# Altium PCB Simple Watch Development Board.PcbDoc (part 1 of 2)
Units mil, origin at the board's own origin, x right, y up, seen from the top; angles counter-clockwise.
Board outline 3937.01 x 2559.06 mil, 4 copper layers (Top Layer, Signal Layer 1, Ground Plane, Bottom Layer), stack 40.634 mil thick; 125 components, 93 nets, 403 pads, 128 vias.
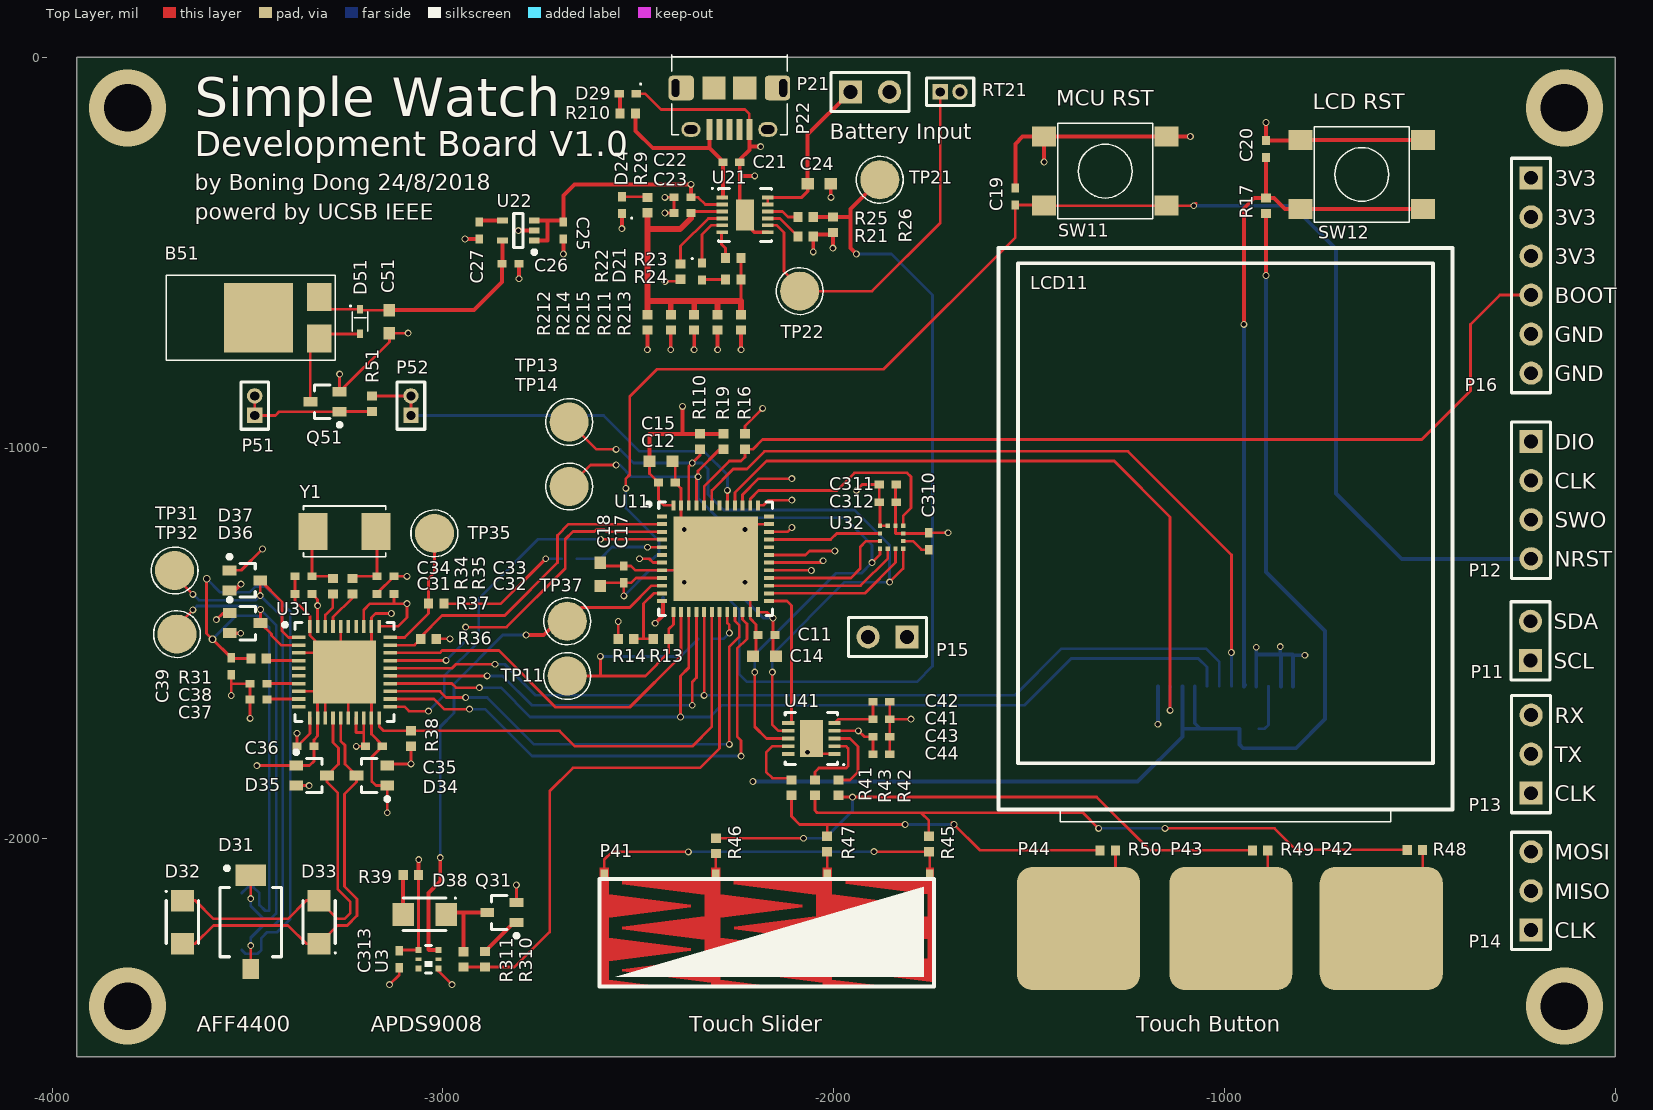
[diagram p0: Top Layer view]
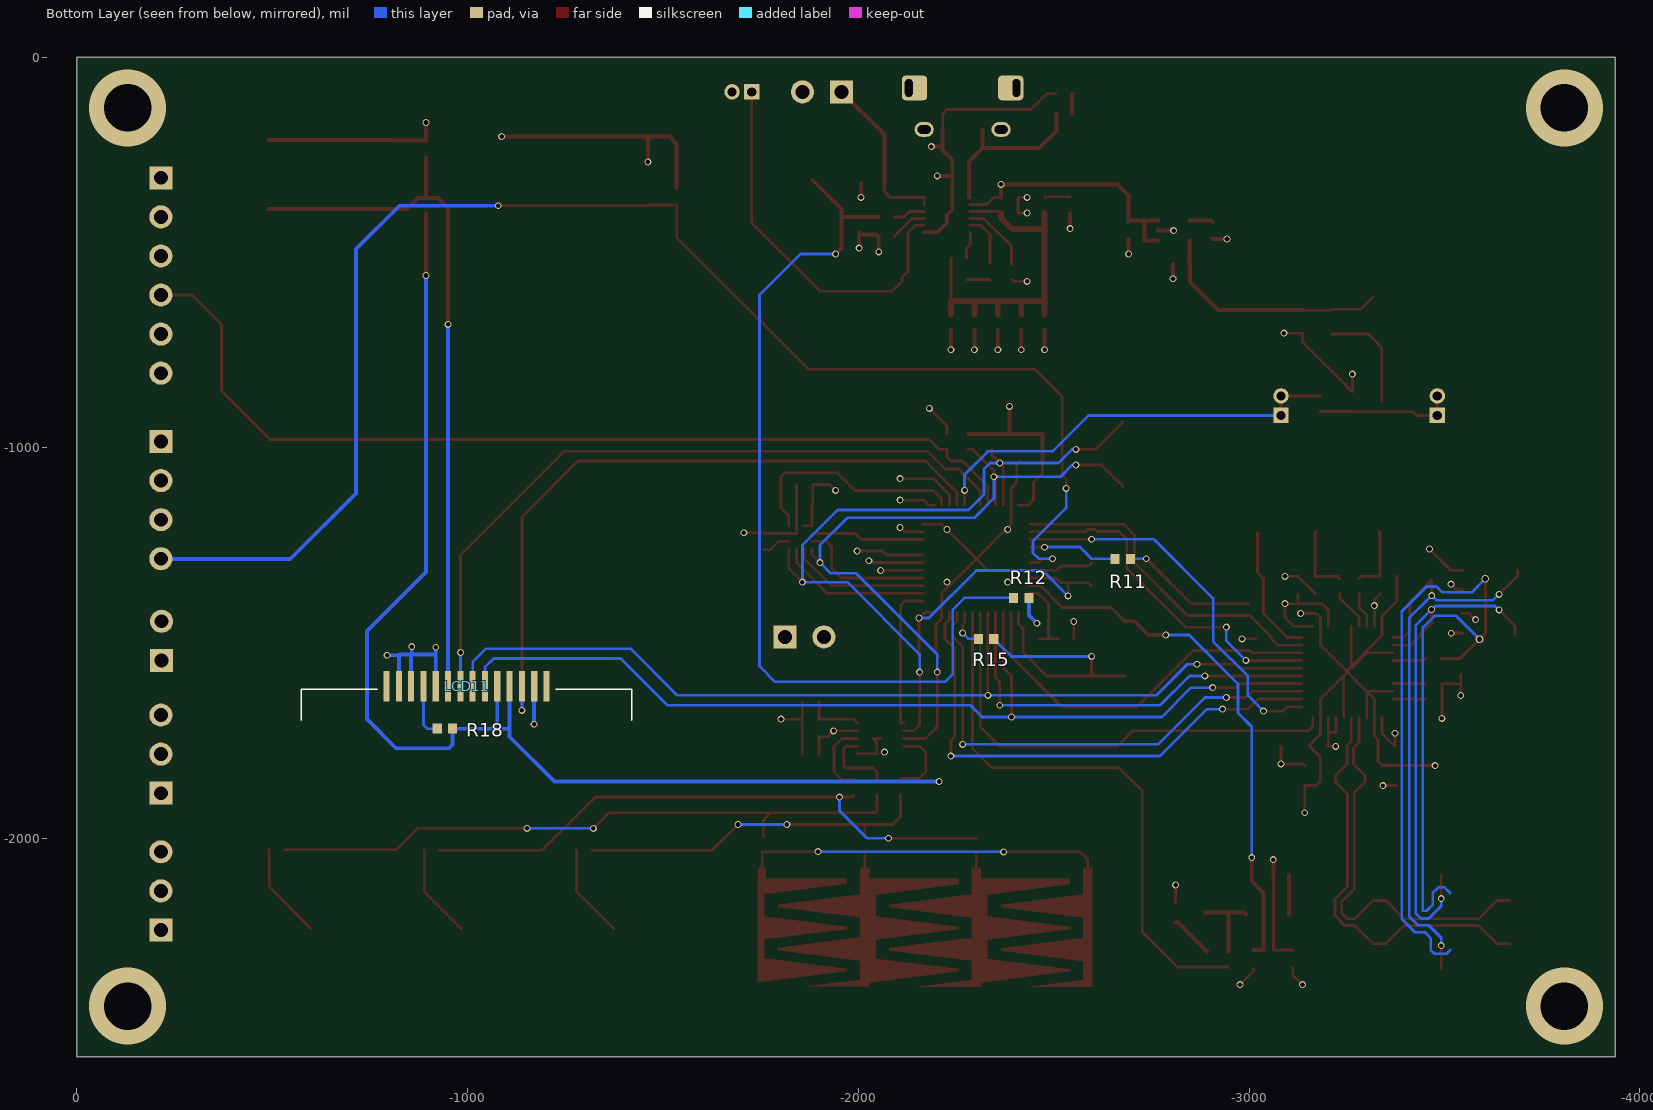
[diagram p1: Bottom Layer view, seen from below]
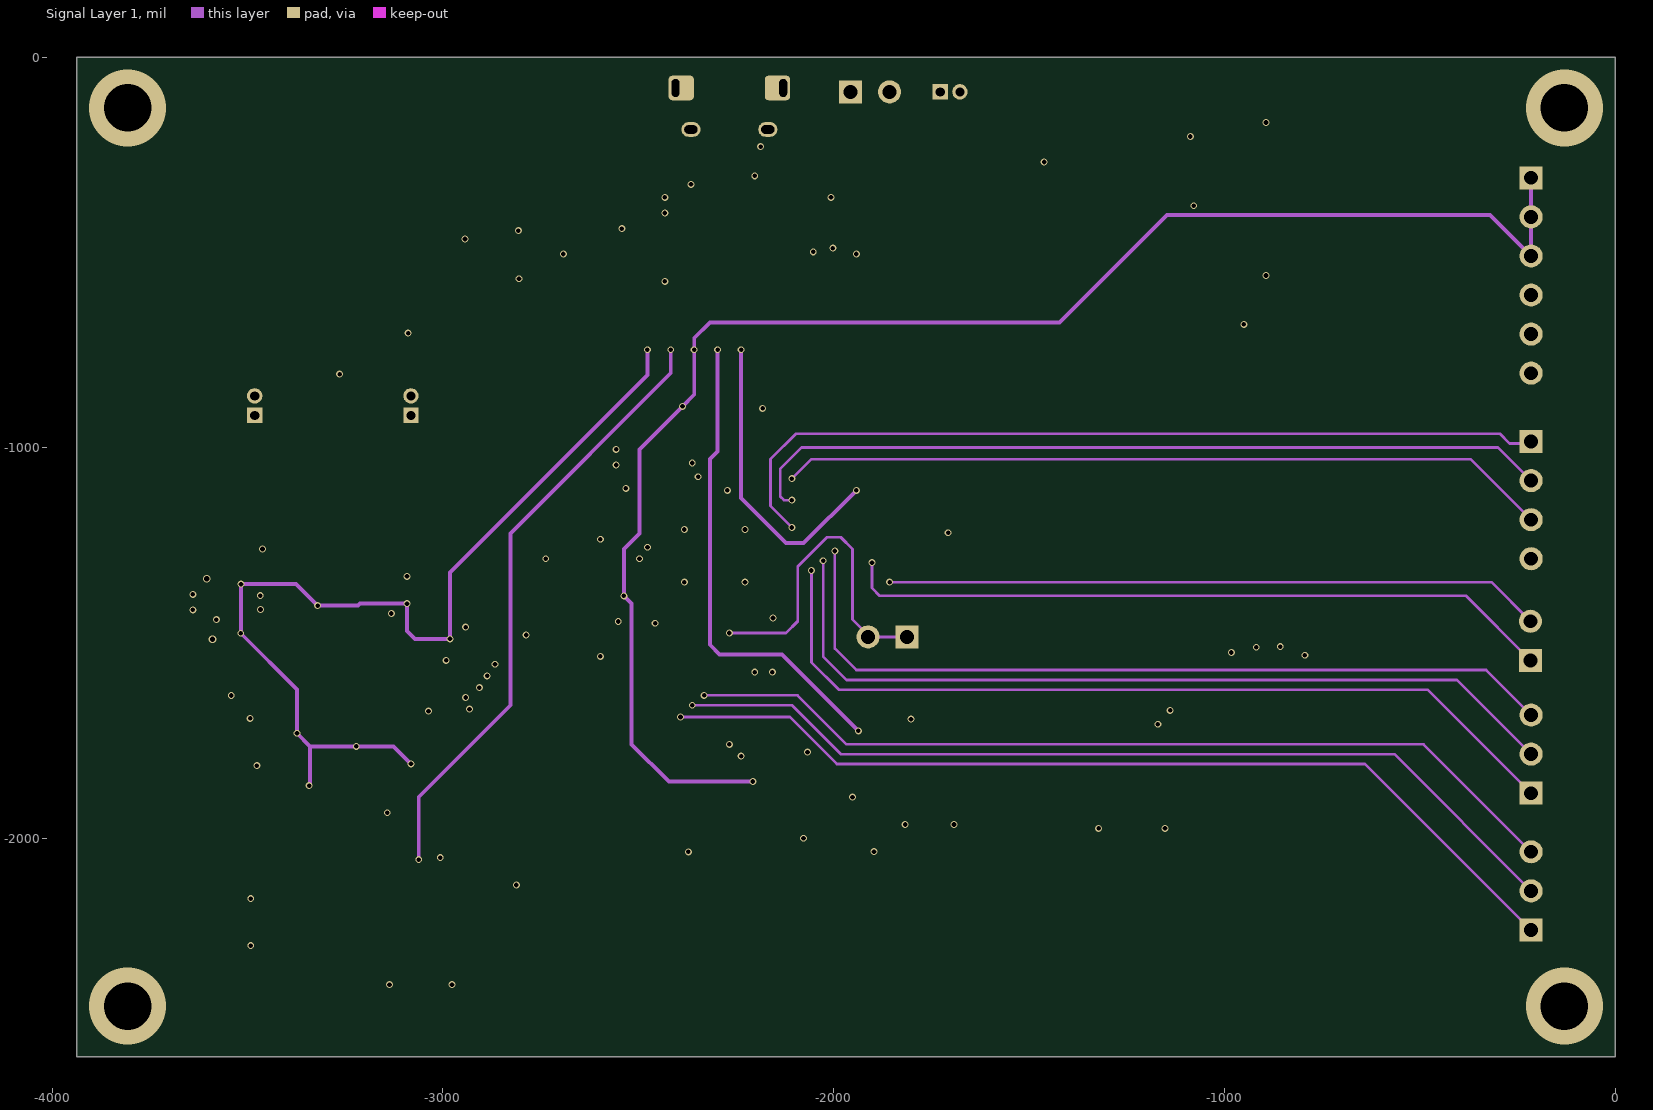
[diagram p2: Signal Layer 1]
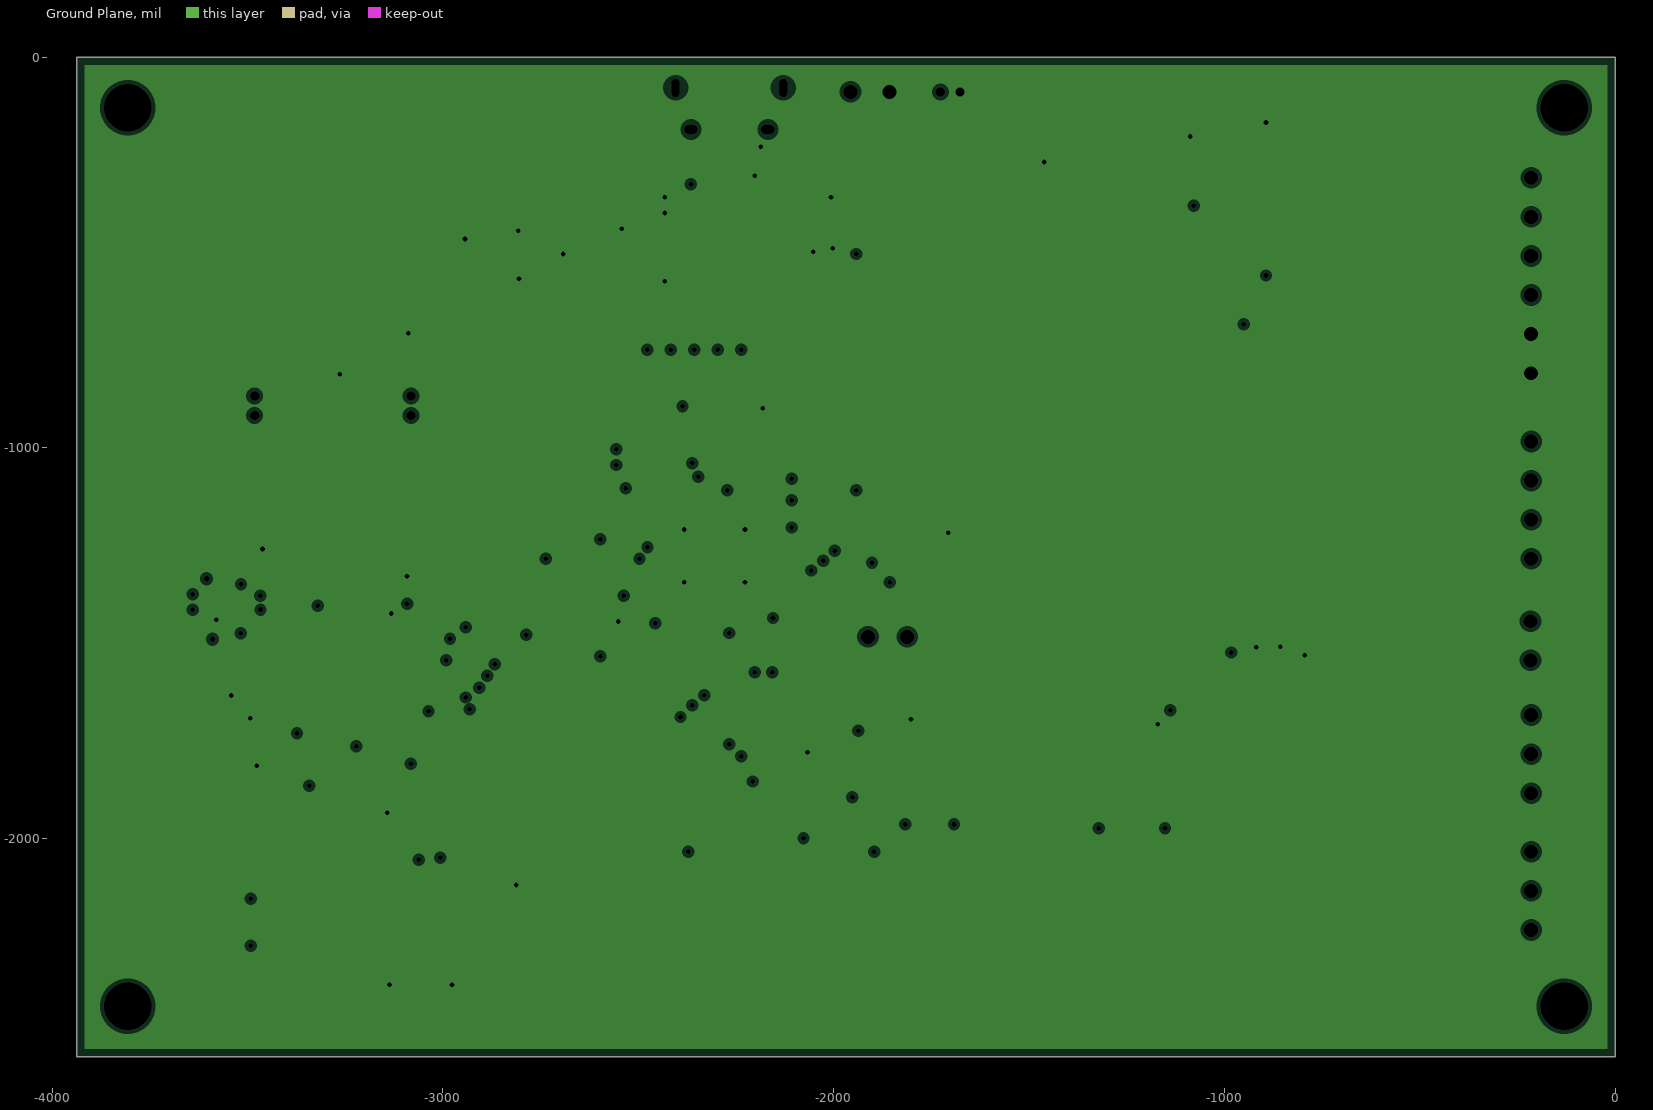
[diagram p3: Ground Plane, clearances drawn from the general rule]
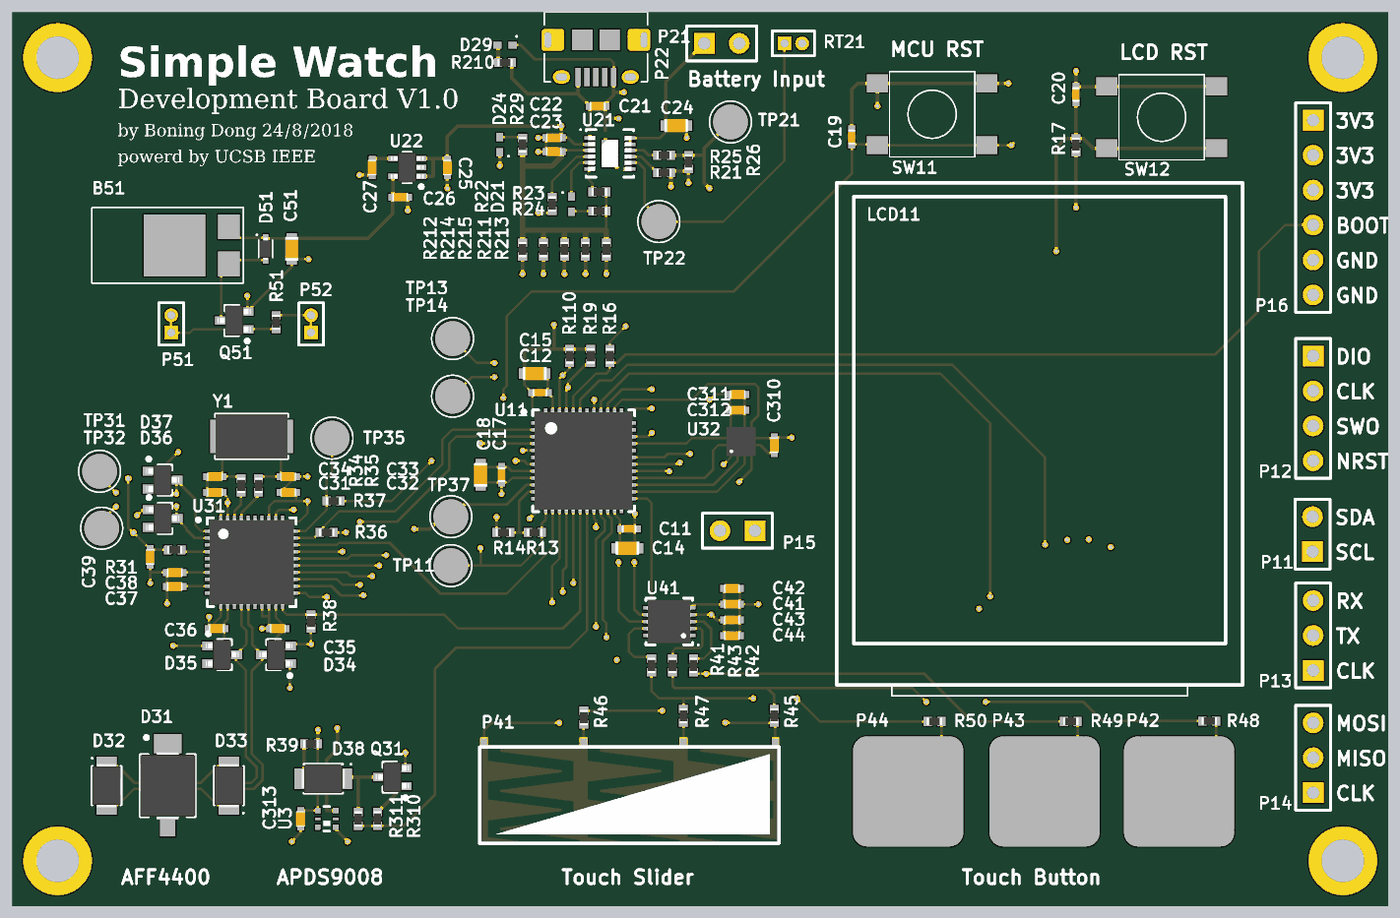
[diagram p5: 3D render of the assembled board from above, using the file's embedded part models]
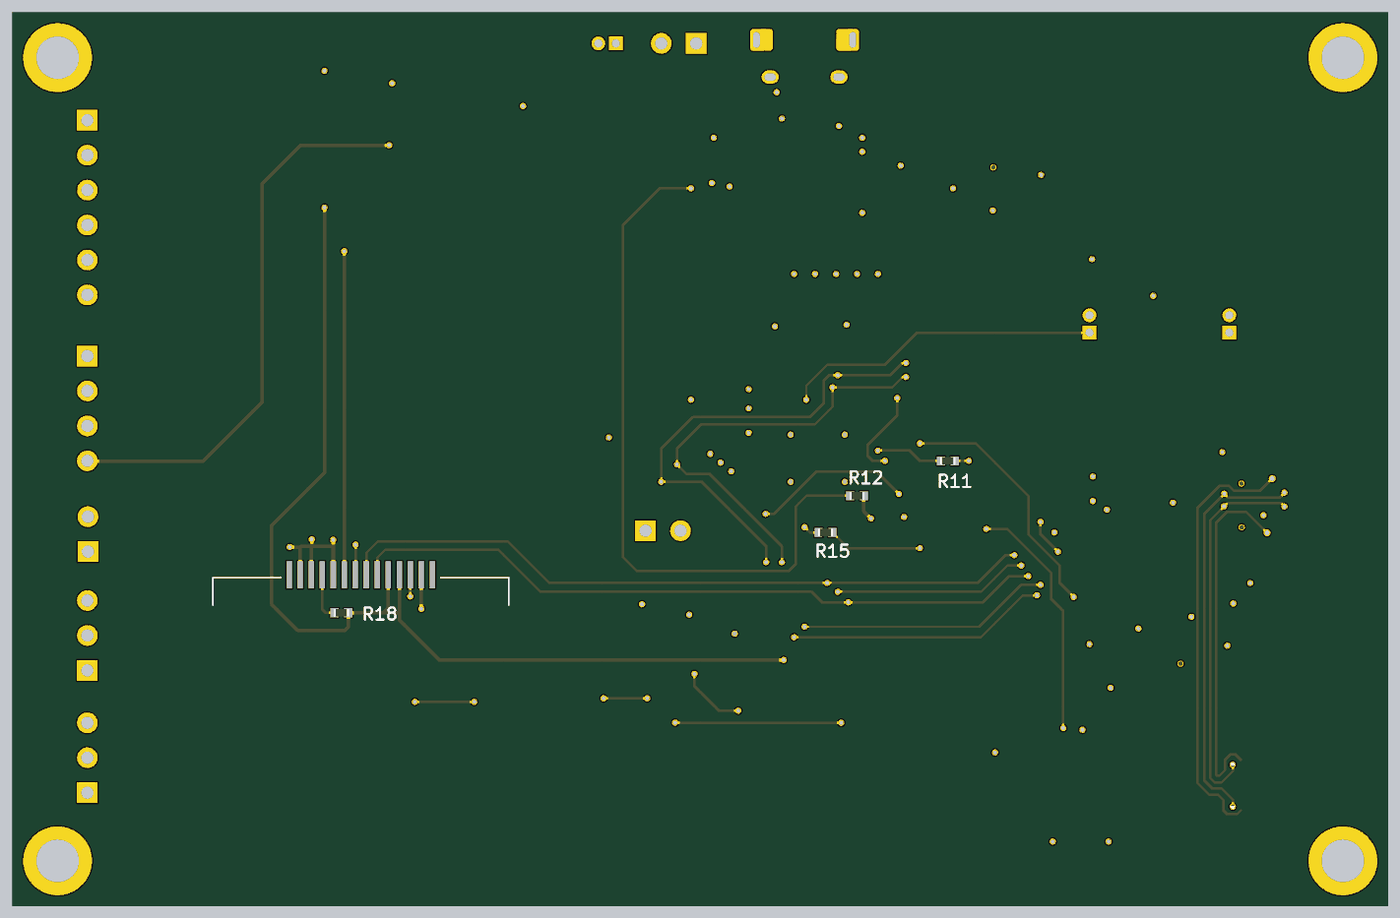
[diagram p6: 3D render of the assembled board from below, using the file's embedded part models]

## Layer stack, top to bottom
Top Solder: solder mask 0.4, Solder Resist, Dk 3.5
Top Layer: signal copper 1.4
Dielectric 1: core 20, FR-4, Dk 4.2
Signal Layer 1: signal copper 1.417
Dielectric 3: prepreg 5, Dk 4.2
Ground Plane: plane copper 1.417, net GND
Dielectric 2: core 10, Dk 4.2
Bottom Layer: signal copper 1.4
Bottom Solder: solder mask 0.4, Solder Resist, Dk 3.5

## Board outline
-3937.01,-2559.06 0,-2559.06 0,0 -3937.01,0

## Design rules (kind name [scope] priority, off if disabled: settings)
Clearance [All] p1: gap=5 ignorepadtopadclearanceinfootprint=FALSE
DiffPairsRouting [All] p1: maxlimit=20 minlimit=10 mostfreqgap=10 toplayer_minwidth=5 toplayer_maxwidth=15 toplayer_prefwidth=15 midlayer1_minwidth=5 midlayer1_maxwidth=15 midlayer1_prefwidth=15 bottomlayer_minwidth=5 bottomlayer_maxwidth=15 bottomlayer_prefwidth=15 maxuncoupledlength=500
PlaneClearance [All] p1: clearance=10
PlaneConnect [All] p1: planeconnectstyle=Relief reliefexpansion=20 reliefentries=4 reliefconductorwidth=10 reliefairgap=10
PolygonConnect [All] p1: connectstyle=Relief reliefconductorwidth=10 reliefentries=4 polygonreliefangle="90 Angle" airgapwidth=10
RoutingVias [All] p1: holewidth=28 width=50 viastyle="Through Hole" minholewidth=28 minwidth=50 maxholewidth=28 maxwidth=50
SolderMaskExpansion [All] p1: expansion=4
Width [All] p1: maxlimit=20 minlimit=5 preferedwidth=10
27 further rules are at their usual default settings.

## Classes and differential pairs
component class "U_SCH_5_Vibration Motor": B51 C51 D51 P51 P52 Q51 R51
net class DIFF: AFE_IN_N AFE_IN_P AFE_TX_N AFE_TX_P
net class POWER_SUPPLY: APDS_SUP LED_DRV_SUP LSM303_SUP MCU_SUP MOTOR_SUP TSC_SUP
net class TOUCH_SENSE_CHANNEL: CH1 CH2 CH3 NetR41_1 NetR42_1 NetR43_1
net class VDD_POWER: GND MCU_SUP
net class UART: USART1_CLK USART1_RX USART1_TX
net class SPI: SPI1_MISO SPI1_MOSI SPI1_SCK
net class MCU_POWER: MCU_SUP
net class MCU_DEBUG: NRST SWCLK SWDIO SWO
net class I2C: I2C1_SCL I2C1_SDA
net class BOOTLOADER: BOOT
component class "U_SCH_4_Touch Sensors": C41 C42 C43 C44 P41 P42 P43 P44 R41 R42 R43 R45 R46 R47 R48 R49 R50 U41
component class "U_SCH_3_Heartrate & Motion Sensors": C31 C32 C33 C34 C35 C36 C37 C38 C39 C310 C311 C312 C313 D31 D32 D33 D34 D35 D36 D37 D38 Q31 R31 R34 R35 R36 R37 R38 R39 R310 R311 TP31 TP32 TP35 TP37 U3 U31 U32 Y1
component class "U_SCH_2_Battery & Power Management": C21 C22 C23 C24 C25 C26 C27 D21 D24 D25 D26 D27 D28 D29 P21 P22 R21 R22 R23 R24 R25 R26 R29 R210 R211 R212 R213 R214 R215 RT21 TP21 TP22 U21 U22
component class U_SCH_1_Controller: C11 C12 C14 C15 C17 C18 C19 C20 LCD11 P11 P12 P13 P14 P15 P16 R11 R12 R13 R14 R15 R16 R17 R18 R19 R110 SW11 SW12 TP11 TP13 TP14 U11
differential pair AFE_TX: +AFE_TX_P -AFE_TX_N
differential pair AFE_IN: +AFE_IN_P -AFE_IN_N

## Components (designator, comment, footprint, x,y, rotation, side; value= is the part's Value field where it differs from the comment)
B51 "Z4FC1B1301781" Z4FC1B1301781 -3317.01,-667.2 r0 top
C11 "0402" CAPC1005X06N -2172.01,-1479.06 r0 top value=100nF
C12 "0402" CAPC1005X06N -2427.01,-1089.06 r180 top locked value=100nF
C14 "0603" CAPC1608X09N -2177.01,-1534.06 r0 top value=4.7uF
C15 "0603" CAPC1608X09N -2442.01,-1034.06 r180 top locked value=4.7uF
C17 "0402" CAPC1005X06N -2537.01,-1324.06 r270 top value=100nF
C18 "0603" CAPC1608X09N -2597.01,-1324.06 r270 top value=1uF
C19 "0402" CAPC1005X06N -1535,-356.89 r270 top value=100nF
C20 "0402" CAPC1005X06N -893.5,-235.47 r90 top value=100nF
C21 "0402" CAPC1005X07N -2262.01,-269.06 r180 top locked value=2.2uF
C22 "0402" CAPC1005X07N -2387.01,-359.06 r0 top locked value=2.2uF
C23 "0402" CAPC1005X07N -2387.01,-399.06 r0 top locked value=2.2uF
C24 "0603" CAPC1608X10N -2037.01,-324.06 r180 top locked value=4.7uF
C25 "0402" CAPC1005X07N -2692.01,-444.06 r90 top value=1uF
C26 "0402" CAPC1005X07N -2827.01,-529.06 r180 top locked value=1uF
C27 "0402" CAPC1005X07N -2907.01,-444.06 r90 top locked value=1uF
C31 "0402" CAPC1005X07N -3357.01,-1374.06 r0 top locked value=0.1uF
C32 "0402" CAPC1005X07N -3147.01,-1374.06 r0 top locked value=0.1uF
C33 "0402" CAPC1005X07N -3147.01,-1329.06 r180 top locked value=18pF
C34 "0402" CAPC1005X07N -3357.01,-1329.06 r180 top locked value=18pF
C35 "0402" CAPC1005X07N -3177.01,-1764.06 r180 top locked value=1uF
C36 "0402" CAPC1005X07N -3352.01,-1764.06 r180 top locked value=0.1uF
C37 "0402" CAPC1005X07N -3472.01,-1644.06 r0 top locked value=2.2uF
C38 "0402" CAPC1005X07N -3472.01,-1604.06 r0 top locked value=2.2uF
C39 "0402" CAPC1005X07N -3542.01,-1559.06 r90 top locked value=0.01uF
C41 "0402" CAPC1005X07N -1877.95,-1694.68 r180 top value=100pF
C42 "0402" CAPC1005X07N -1877.95,-1649.68 r180 top value=1uF
C43 "0402" CAPC1005X07N -1877.95,-1739.68 r180 top value=100pF
C44 "0402" CAPC1005X07N -1877.95,-1784.68 r180 top value=1uF
C51 "0603" CAPC1608X10N -3137.01,-677.2 r90 top value=1uF
C310 "0402" CAPC1005X07N -1756.69,-1239.06 r270 top value=0.22uF
C311 "0402" CAPC1005X07N -1861.69,-1094.06 r180 top value=10uF
C312 "0402" CAPC1005X07N -1861.69,-1139.06 r180 top value=0.1uF
C313 "0402" CAPC1005X07N -3112.01,-2309.06 r90 top value=0.1uF
D21 "LED" LED_1005X05N -2337.01,-549.06 r90 top locked
D24 "LED" LED_1005X05N -2542.01,-379.06 r270 top
D29 "LED" LED_1005X05N -2527.01,-94.06 r0 top locked
D31 "SFH-2430" PHOTODIODE_OSRAM_SFH_2430 -3492.01,-2214.06 r90 top
D32 "AA3021" LED_KINGBRIGHT_AA3021 -3667.01,-2214.06 r90 top
D33 "AA3021" LED_KINGBRIGHT_AA3021 -3317.01,-2214.06 r270 top
D34 "BAV99WT1G" SOT65P200X125X90-3N -3182.01,-1839.06 r180 top locked
D35 "BAV99WT1G" SOT65P200X125X90-3N -3336.38,-1839.06 r0 top locked
D36 "BAV99WT1G" SOT65P200X125X90-3N -3506.38,-1449.06 r0 top locked
D37 "BAV99WT1G" SOT65P200X125X90-3N -3507.01,-1339.06 r0 top locked
D38 "AA3021" LED_KINGBRIGHT_AA3021 -3047.01,-2194.06 r0 top
D51 "1N914BWT" SODFL160X70-2N -3212.01,-677.2 r90 top
LCD11 "ILI9168_LCD_Module" LCD_SMT_128X128 -997.24,-1925.43 r0 top
P11 "Header 2" HDR1X2 -216.69,-1544.06 r90 top
P12 "Header 4" HDR1X4 -215,-984.06 r270 top
P13 "Header 3" HDR1X3 -215,-1884.06 r90 top
P14 "Header 3" HDR1X3 -215,-2234.06 r90 top
P15 "Header 2" HDR1X2 -1812.01,-1484.06 r180 top
P16 "Header 6" HDR1X6 -215,-309.06 r270 top
P21 "BAT" HDR1X2 -1957.01,-89.06 r0 top locked
P22 "Micro USB" "USB_Mirco_Amphenol FCI_10118194" -2267.01,-79.06 r180 top locked
P41 "Touchpad Slider" TPAD_SLIDER_21X7 -2599.27,-2379.06 r0 top
P42 "Single Touchpad" TPAD_8X8 -598.5,-2230.47 r0 top
P43 "Single Touchpad" TPAD_8X8 -983.5,-2230.47 r0 top
P44 "Single Touchpad" TPAD_8X8 -1373.5,-2230.47 r0 top
P51 "MHDR1X2" MHDR1X2 -3482.01,-917.2 r90 top
P52 "MHDR1X2" MHDR1X2 -3082.01,-917.2 r90 top
Q31 "DMG1012T" SOT65P200X125X95-3N -2849.41,-2189.65 r180 top
Q51 "DMG1012T" SOT65P200X125X95-3N -3302.01,-882.2 r180 top
R11 "0402" RESC1005X04N -2677.01,-1284.06 r0 bottom value=0R
R12 "0402" RESC1005X04N -2417.01,-1384.06 r180 bottom value=0R
R13 "0402" RESC1005X04N -2442.01,-1489.06 r0 top locked value=?R
R14 "0402" RESC1005X04N -2531.69,-1489.06 r0 top locked value=?R
R15 "0402" RESC1005X04N -2327.01,-1489.06 r180 bottom locked value=0R
R16 "0402" RESC1005X04N -2227.01,-984.06 r90 top value=10K
R17 "0402" RESC1005X04N -893.5,-380.47 r270 top value=10K
R18 "0402" RESC1005X04N -942.01,-1719.06 r180 bottom value=10R
R19 "0402" RESC1005X04N -2282.01,-984.06 r270 top value=1K
R21 "0402" RESC1005X04N -2072.01,-459.06 r180 top locked value=?
R22 "0402" RESC1005X04N -2392.01,-549.06 r90 top locked value=1k
R23 "0402" RESC1005X04N -2257.01,-514.06 r180 top locked value=1k
R24 "0402" RESC1005X04N -2257.01,-569.06 r180 top locked value=1k
R25 "0402" RESC1005X04N -2072.01,-409.06 r0 top locked value=1k
R26 "0402" RESC1005X04N -2002.01,-429.06 r270 top locked value=1k
R29 "0402" RESC1005X04N -2477.01,-379.06 r90 top value=1k
R31 "0402" RESC1005X04N -3472.01,-1539.06 r0 top locked value=1K
R34 "0402" RESC1005X04N -3282.01,-1354.37 r90 top locked value=0R
R35 "0402" RESC1005X04N -3232.01,-1354.37 r90 top locked value=0R
R36 "0402" RESC1005X04N -3037.01,-1489.06 r0 top value=10K
R37 "0402" RESC1005X04N -3017.32,-1399.06 r180 top value=10R
R38 "0402" RESC1005X04N -3082.01,-1744.06 r270 top locked value=10K
R39 "0402" RESC1005X04N -3082.01,-2094.06 r0 top value=10K
R41 "0402" RESC1005X04N -2107.95,-1869.68 r270 top value=470R
R42 "0402" RESC1005X04N -1987.95,-1869.68 r270 top value=470R
R43 "0402" RESC1005X04N -2047.95,-1869.68 r270 top value=470R
R45 "0402" RESC1005X04N -1756.58,-2014.06 r270 top value=0R
R46 "0402" RESC1005X04N -2301.58,-2019.06 r270 top value=0R
R47 "0402" RESC1005X04N -2016.58,-2014.06 r270 top value=0R
R48 "0402" RESC1005X04N -512.32,-2029.06 r0 top value=0R
R49 "0402" RESC1005X04N -908.5,-2030.16 r0 top value=0R
R50 "0402" RESC1005X04N -1298.5,-2030.16 r0 top value=0R
R51 "0402" RESC1005X04N -3182.01,-887.2 r90 top value=0R
R110 "0402" RESC1005X04N -2342.01,-984.06 r270 top value=1K
R210 "0402" RESC1005X04N -2527.01,-144.06 r180 top locked value=1k
R211 "0402" RESC1005X04N -2297.01,-679.06 r270 top value=0R
R212 "0402" RESC1005X04N -2477.01,-679.06 r270 top value=0R
R213 "0402" RESC1005X04N -2237.01,-679.06 r270 top value=0R
R214 "0402" RESC1005X04N -2417.01,-679.06 r270 top value=0R
R215 "0402" RESC1005X04N -2357.01,-679.06 r270 top value=0R
R310 "0402" RESC1005X04N -2892.01,-2309.06 r90 top value=0R
R311 "0402" RESC1005X04N -2947.01,-2309.37 r90 top value=0R
RT21 "Res Thermal" MHDR1X2 -1727.01,-89.06 r0 top
SW11 "Tactile Switch" C&K_PTS645_SMT -1305,-291.89 r180 top
SW12 "Tactile Switch" C&K_PTS645_SMT -648.5,-300.47 r0 top
TP11 "TP" TP100 -2682.01,-1584.06 r0 top
TP13 "TP" TP100 -2677.01,-934.06 r90 top locked
TP14 "TP" TP100 -2677.01,-1099.06 r90 top locked
TP21 "TP" TP100 -1882.01,-314.06 r0 top locked
TP22 "TP" TP100 -2087.01,-599.06 r90 top locked
TP31 "TP" TP100 -3687.01,-1314.06 r0 top locked
TP32 "TP" TP100 -3680.91,-1476.93 r90 top locked
TP35 "TP" TP100 -3022.01,-1219.06 r90 top locked
TP37 "TP" TP100 -2682.01,-1444.06 r90 top locked
U3 "APDS-9008" APDS-9008 -3037.01,-2309.06 r90 top
U11 "STM32L452CC" QFN50P700X700X60-48N_HS550X550 -2302.01,-1284.06 r0 top locked
U21 "STNS01" DFN45P300X300X80-12N_HS200X120 -2227.01,-404.06 r0 top locked
U22 "LDK120C30R" SOT65P210X110-5L -2807.01,-444.06 r180 top locked
U31 "AFE4400" QFN50P600X600X100-40N_HS410 -3252.01,-1574.06 r0 top locked
U32 "ST_LSM303AGR" LGA12S50P4X4_200X200X100 -1851.69,-1229.06 r90 top
U41 "IQS263" DFN50P300X300-10N_HS240X150 -2057.01,-1744.06 r180 top
Y1 "ABM3_8MHz" ABRACON_ABM3 -3252.01,-1214.06 r0 top locked

## Footprints (in the part's own frame and the unit in brackets; to place one, negate y for a bottom-side part, rotate by r counter-clockwise, add the part's x,y. Pads: shape width x height; smd on the part's side, far side on the other; paste and mask are expansions set on the pad)
ABRACON_ABM3 [mm] "Abracon ABM3 series, 2-Leads, Body 3.10x5.00mm"
  rect 1.9x2.4 smd: 1(-2.05,0) 2(2.05,0)
  silkscreen extent -2.67,-1.65 2.67,1.65, body extent -2.6,-1.6 2.6,1.6, height 1.3
APDS-9008 [mm] "SMT 1.6mm x 1.5mm x 0.55mm Ambient Light Sensor"
  rect 0.4x0.4 smd: 1(0.6,0.65) 3(-0.6,0.65) 4(-0.6,-0.65) 6(0.6,-0.65)
  rect 0.2x0.4 smd: 2(0,0.65) 5(0,-0.65)
  silkscreen extent -0.89,-0.25 0.89,0.25, body extent -0.75,-0.8 0.75,0.8, height 0.55
C&K_PTS645_SMT [mm] "C&K PTS645 6mm x 6mm Tact Switch"
  rect 1.55x1.3 smd: 1(-3.975,2.25) 2(3.975,2.25) 3(-3.975,-2.25) 4(3.975,-2.25)
  silkscreen extent -3.1,-3.1 3.1,3.1
CAPC1005X06N [mm] "0402 Chip Capacitor, 2-Leads, Body 1.00x0.50mm, IPC Medium Density"
  rect 0.6x0.5 smd: 1(-0.55,0) 2(0.55,0)
  body extent -0.55,-0.28 0.55,0.28, height 0.6
CAPC1005X07N [mm] "0402 Chip Capacitor, 2-Leads, Body 1.00x0.50mm, IPC Medium Density"
  rect 0.6x0.5 smd: 1(-0.55,0) 2(0.55,0)
  body extent -0.58,-0.33 0.58,0.33, height 0.71
CAPC1608X09N [mm] "0603 Chip Capacitor, 2-Leads, Body 1.60x0.81mm, IPC Medium Density"
  rect 0.8x0.75 smd: 1(-0.75,0) 2(0.75,0)
  body extent -0.87,-0.48 0.87,0.48, height 0.94
CAPC1608X10N [mm] "0603 Chip Capacitor, 2-Leads, Body 1.60x0.81mm, IPC Medium Density"
  rect 0.8x0.75 smd: 1(-0.75,0) 2(0.75,0)
  body extent -0.87,-0.48 0.87,0.48, height 1.02
DFN45P300X300X80-12N_HS200X120 [mm] "DFN, 12-Leads, Body 3.00x3.00mm, Pitch 0.45mm, Thermal Pad 2.00x1.19mm, IPC Medium Density"
  rect 0.75x0.25 smd: 1(-1.475,1.125) 2(-1.475,0.675) 3(-1.475,0.225) 4(-1.475,-0.225) 5(-1.475,-0.675) 6(-1.475,-1.125) 7(1.475,-1.125) 8(1.475,-0.675) 9(1.475,-0.225) 10(1.475,0.225) 11(1.475,0.675) 12(1.475,1.125)
  rect 1.19x2 smd: 13(0,0)
  silkscreen extent -2.17,-1.73 1.73,1.77, body extent -1.62,-1.57 1.63,1.58, height 0.8
DFN50P300X300-10N_HS240X150 [mm] "DFN, 10-Leads, Body 3.00x3.00mm, Pitch 0.50mm, Thermal Pad 2.40x1.50mm, IPC Medium Density"
  rect 0.8x0.25 smd: 1(-1.5,1) 2(-1.5,0.5) 3(-1.5,0) 4(-1.5,-0.5) 5(-1.5,-1) 6(1.5,-1) 7(1.5,-0.5) 8(1.5,0) 9(1.5,0.5) 10(1.5,1)
  rect 1.49x2.4 smd: 11(0,0)
  silkscreen extent -2.15,-1.7 1.7,1.75, body extent -1.6,-1.55 1.6,1.55, height 0.8
HDR1X2 [mm] "Connector; Header; 2 Position"
  rect 1.5x1.5 hole 0.9: 1(0,0)
  round 1.5 hole 0.9: 2(2.54,0)
  silkscreen extent -1.27,-1.27 3.81,1.27
HDR1X3 [mm] "Connector; Header; 3 Position"
  rect 1.5x1.5 hole 0.9: 1(0,0)
  round 1.5 hole 0.9: 2(2.54,0) 3(5.08,0)
  silkscreen extent -1.27,-1.27 6.35,1.27
HDR1X4 [mm] "Connector; Header; 4 Position"
  rect 1.5x1.5 hole 0.9: 1(0,0)
  round 1.5 hole 0.9: 2(2.54,0) 3(5.08,0) 4(7.62,0)
  silkscreen extent -1.27,-1.27 8.89,1.27
HDR1X6 [mm] "Connector; Header; 6 Position"
  rect 1.5x1.5 hole 0.9: 1(0,0)
  round 1.5 hole 0.9: 2(2.54,0) 3(5.08,0) 4(7.62,0) 5(10.16,0) 6(12.7,0)
  silkscreen extent -1.27,-1.27 13.97,1.27
LCD_SMT_128X128 [mm] "128 x 128 pixels surface mount display"
  rect 0.4x2 smd far side: 1(5.2,8) 2(4.4,8) 3(3.6,8) 4(2.8,8) 5(2,8) 6(1.2,8) 7(0.4,8) 8(-0.4,8) 9(-1.2,8) 10(-2,8) 11(-2.8,8) 12(-3.6,8) 13(-4.4,8) 14(-5.2,8)
  silkscreen extent -14.75,-0.8 14.75,36.5
LED_1005X05N [mm] "General 0402 SMT LED, 2-Leads, Body 1.00x0.50mm, IPC Medium Density"
  rect 0.6x0.5 smd: 1(-0.55,0) 2(0.55,0)
  silkscreen extent 0.79,0.59 0.89,0.68
LED_KINGBRIGHT_AA3021 [mm] "Kingbright AA3021 Series, 2-Leads, Body 2.70x2.00mm, IPC Medium Density"
  rect 1.4x1.5 smd: 1(-1.4,0) 2(1.4,0)
  silkscreen extent -1.4,-1.05 2.05,1.1, body extent -1.62,-1.05 1.62,1.05, height 1.3
LGA12S50P4X4_200X200X100 [mm] "LGA, 12-Leads, Body 2.00x2.00mmx1.00mm, Pitch 0.50mm"
  rect 0.275x0.275 smd: 1(-0.75,0.75) 2(-0.75,0.25) 3(-0.75,-0.25) 4(-0.75,-0.75) 5(-0.25,-0.75) 6(0.25,-0.75) 7(0.75,-0.75) 8(0.75,-0.25) 9(0.75,0.25) 10(0.75,0.75) 11(0.25,0.75) 12(-0.25,0.75)
  body extent -1.05,-1.05 1.05,1.05, height 1
MHDR1X2 [mm] "Connector; Header; 2 Position"
  rect 1x1 hole 0.6: 1(0,0)
  round 1 hole 0.6: 2(1.27,0)
  silkscreen extent -0.9,-0.9 2.17,0.9
PHOTODIODE_OSRAM_SFH_2430 [mm] "OSRAM_SFH_2430 Photonic Diode, 2-Leads, Body 4.40x3.85mm"
  rect 1.3x1.1 smd: 1(-3.05,0)
  rect 1.4x2 smd: 2(3.05,0)
  silkscreen extent -2.25,-2 3.62,2, body extent -2.47,-2 2.47,2, height 1.3
QFN50P600X600X100-40N_HS410 [mm] "QFN, 40-Leads, Body 6.00x6.00mm, Pitch 0.50mm, Thermal Pad 4.10x4.10mm, IPC Medium Density"
  rect 0.85x0.23 smd: 1(-2.975,2.25) 2(-2.975,1.75) 3(-2.975,1.25) 4(-2.975,0.75) 5(-2.975,0.25) 6(-2.975,-0.25) 7(-2.975,-0.75) 8(-2.975,-1.25) 9(-2.975,-1.75) 10(-2.975,-2.25) 21(2.975,-2.25) 22(2.975,-1.75) 23(2.975,-1.25) 24(2.975,-0.75) 25(2.975,-0.25) 26(2.975,0.25) 27(2.975,0.75) 28(2.975,1.25) 29(2.975,1.75) 30(2.975,2.25)
  rect 0.23x0.85 smd: 11(-2.25,-2.975) 12(-1.75,-2.975) 13(-1.25,-2.975) 14(-0.75,-2.975) 15(-0.25,-2.975) 16(0.25,-2.975) 17(0.75,-2.975) 18(1.25,-2.975) 19(1.75,-2.975) 20(2.25,-2.975) 31(2.25,2.975) 32(1.75,2.975) 33(1.25,2.975) 34(0.75,2.975) 35(0.25,2.975) 36(-0.25,2.975) 37(-0.75,2.975) 38(-1.25,2.975) 39(-1.75,2.975) 40(-2.25,2.975)
  rect 4.1x4.1 smd: 41(0,0)
  silkscreen extent -4,-3.22 3.22,3.22, body extent -3.13,-3.13 3.13,3.13, height 1
QFN50P700X700X60-48N_HS550X550 [mm] "QFN, 48-Leads, Body 7.00x7.00mm, Pitch 0.50mm, Thermal Pad 5.50x5.50mm, IPC Medium Density"
  rect 0.65x0.25 smd: 1(-3.475,2.75) 2(-3.475,2.25) 3(-3.475,1.75) 4(-3.475,1.25) 5(-3.475,0.75) 6(-3.475,0.25) 7(-3.475,-0.25) 8(-3.475,-0.75) 9(-3.475,-1.25) 10(-3.475,-1.75) 11(-3.475,-2.25) 12(-3.475,-2.75) 25(3.475,-2.75) 26(3.475,-2.25) 27(3.475,-1.75) 28(3.475,-1.25) 29(3.475,-0.75) 30(3.475,-0.25) 31(3.475,0.25) 32(3.475,0.75) 33(3.475,1.25) 34(3.475,1.75) 35(3.475,2.25) 36(3.475,2.75)
  rect 0.25x0.65 smd: 13(-2.75,-3.475) 14(-2.25,-3.475) 15(-1.75,-3.475) 16(-1.25,-3.475) 17(-0.75,-3.475) 18(-0.25,-3.475) 19(0.25,-3.475) 20(0.75,-3.475) 21(1.25,-3.475) 22(1.75,-3.475) 23(2.25,-3.475) 24(2.75,-3.475) 37(2.75,3.475) 38(2.25,3.475) 39(1.75,3.475) 40(1.25,3.475) 41(0.75,3.475) 42(0.25,3.475) 43(-0.25,3.475) 44(-0.75,3.475) 45(-1.25,3.475) 46(-1.75,3.475) 47(-2.25,3.475) 48(-2.75,3.475)
  rect 5.5x5.5 smd: 49(0,0)
  silkscreen extent -4.47,-3.7 3.7,3.7, body extent -3.6,-3.6 3.6,3.6, height 0.6
RESC1005X04N [mm] "0402 Chip Resistor, 2-Leads, Body 1.00x0.50mm, IPC Medium Density"
  rect 0.6x0.65 smd: 1(-0.5,0) 2(0.5,0)
  body extent -0.55,-0.28 0.55,0.27, height 0.4
SODFL160X70-2N [mm] "SOD-523F, 2-Leads, Body 0.80x1.60mm, IPC Medium Density"
  rect 0.55x0.4 smd: 1(-0.8,0) 2(0.8,0)
  silkscreen extent -0.64,-0.51 1.07,0.68, body extent -0.8,-0.45 0.8,0.45, height 0.7
SOT65P200X125X90-3N [mm] "SOT70 (SOT323), 3-Leads, Body 2.00x2.20mm, Pitch 0.65mm, IPC Medium Density"
  rect 0.9x0.65 smd: 1(-1,0.65) 2(-1,-0.65) 3(1,0)
  silkscreen extent -1.13,-1.1 0.67,1.65, body extent -1.2,-1.1 1.2,1.1, height 1
SOT65P200X125X95-3N [mm] "SOT323, 3-Leads, Body 2.00x1.25x0.95mm, Pitch 0.65mm, IPC Medium Density"
  rect 0.9x0.6 smd: 1(-0.95,0.65) 2(-0.95,-0.65) 3(0.95,0)
  silkscreen extent -1.08,-1.1 0.67,1.62, body extent -1.2,-1.1 1.2,1.1, height 1
SOT65P210X110-5L [mm] "SOT323, 5-Leads, Body 2.00x2.10mm, Pitch 0.65mm, IPC High Density"
  rect 0.7x0.4 smd: 1(-1.025,0.65) 2(-1.025,0) 3(-1.025,-0.65) 4(1.025,-0.65) 5(1.025,0.65)
  silkscreen extent -1.15,-1.1 0.3,1.52, body extent -1.2,-1.1 1.2,1.1, height 1.1
TP100 [mil] "100mil (2.54mm) Test Point"
  round 100 smd: 1(0,0)
  silkscreen extent -60,-60 60,60
TPAD_8X8 [mm] "Touch Pad 8mm x 8mm"
  rrect25% 8x8 smd: 1(0,0)
TPAD_SLIDER_21X7 [mm] "Touch Pad Slider 21mm x 7mm"
  rect 0.5x0.5 smd: 1(0.3,7.366) 1(21.463,7.366) 2(7.55,7.366) 3(14.8,7.366)
  Top Layer region: 21.209,7.009 21.75,7.009 21.75,7.747 21.209,7.747
  Top Layer region: 14.5,7.004 15.101,7.004 15.101,7.747 14.5,7.747
  Top Layer region: 0,6.994 0.601,6.994 0.601,7.747 0,7.747
  Top Layer region: 7.25,6.999 7.851,6.999 7.851,7.747 7.25,7.747
  Top Layer region: 15.99,7.009 15.99,6.671 21.324,5.99 21.324,4.57 15.991,3.891 15.991,3.744 21.324,3.065 21.324,1.83 15.99,1.151 15.99,1.001 21.75,0.268 21.75,7.009
  Top Layer region: 14.5,7.004 14.5,0.01 18.639,0.01 15.101,0.46 15.101,1.67 20.434,2.349 20.434,2.515 15.101,3.194 15.101,4.494 20.435,5.173 20.435,5.325 15.101,6.006 15.101,7.004
  Top Layer region: 8.74,7.004 8.74,6.666 14.074,5.985 14.074,4.565 8.741,3.887 8.741,3.739 14.074,3.06 14.074,1.825 8.74,1.146 8.74,0.996 14.5,0.263 14.5,7.004
  Top Layer region: 7.25,6.999 7.25,0.005 11.389,0.005 7.851,0.455 7.851,1.665 13.184,2.344 13.184,2.51 7.851,3.189 7.851,4.489 13.185,5.168 13.185,5.32 7.851,6.001 7.851,6.999
  Top Layer region: 1.49,6.999 1.49,6.661 6.824,5.98 6.824,4.56 1.491,3.882 1.491,3.734 6.824,3.055 6.824,1.82 1.49,1.141 1.49,0.991 7.25,0.258 7.25,6.999
  Top Layer region: 0,6.994 0,0 4.139,0 0.601,0.45 0.601,1.66 5.934,2.339 5.934,2.505 0.602,3.184 0.601,4.484 5.935,5.163 5.935,5.315 0.601,5.996 0.601,6.994
  silkscreen extent 0,0 21.75,7
"USB_Mirco_Amphenol FCI_10118194" [mm] "Amphenol FCI 10118194 Micro USB Connector"
  rect 0.4x1.35 smd: 1(1.3,2.7) 2(0.65,2.7) 3(0,2.7) 4(-0.65,2.7) 5(-1.3,2.7)
  rrect30% 1.65x1.6 hole 1.15 slot 0.5 at 0 deg copper offset 0.375,0: ""(-3.5,0)
  oval 1.25x0.95 hole 0.55 slot 0.85 at 0 deg: ""(-2.5,2.7) ""(2.5,2.7)
  rect 1.5x1.5 smd: ""(-1,0) ""(1,0)
  rrect30% 1.65x1.6 hole 1.15 slot 0.5 at 0 deg copper offset -0.375,0: ""(3.5,0)
  silkscreen extent -3.75,-2.15 3.75,3.05
Z4FC1B1301781 [mm] "Vibration Motor 10.9 x 4.5 x 4.85mm"
  rect 1.6x1.8 smd: 1(0,1.35) 2(0,-1.35)
  rect 4.5x4.5 smd: ""(-3.95,0)
  silkscreen extent -9.95,-2.75 1.05,2.75

## Part data
B51: "VIBRATION MOTOR CYL 2.7V SMD", Manufacturer="Jinlong Machinery & Electronics", Max Operating Temperature=70°C, Min Operating Temperature=-20°C, Manufacturer Part Number=Z4FC1B1301781, Pricing 1="1=3.49, 5=3.302, 10=3.21, 25=3.1184, 50=2.843, 100=2.568, 250=2.4762, 500=2.4396 (USD)", RPM=10000RPM, Stock 1=7323, Supplier 1=Digi-Key, Termination=SMD/SMT
C11 C12 C14 C15 C17 C18 C19 C20 C21 C22 C23 C24 C25 C26 C27 C31 C32 C33 C34 C35 C36 C37 C38 C39 C41 C42 C43 C44 C51 C310 C311 C312 C313: library part Cap, "Capacitor", LatestRevisionDate=17-Jul-2002, LatestRevisionNote="Re-released for DXP Platform.", PackageDescription="Radial Cap, Thru-Hole; 2 Leads; 0.3 in Pin Spacing", PackageReference=RAD-0.3, Published=8-Jun-2000, Publisher="Altium Limited"
D21 D24 D29: "General LED"
D31: library part "Photo Sen", "Photosensitive Diode", LatestRevisionDate=17-Jul-2002, LatestRevisionNote="Re-released for DXP Platform.", PackageReference=PIN2, Published=24-Mar-1999, Publisher="Altium Limited"
D32 D33 D38: library part LED_GREEN, "General Green LED"
D34 D35 D36 D37: library part BAV99WT1, "DIODE ARRAY GP 100V 215MA SC70-3"
D51: "DIODE GEN PURP 75V 200MA SOD523F", Average Rectified Current=200mA, Forward Current=300mA, Forward Voltage=1V, Manufacturer="ON Semiconductor / Fairchild", Max Operating Temperature=150°C, Max Repetitive Reverse Voltage (Vrrm)=75V, Max Reverse Leakage Current=5uA, Min Operating Temperature=-55°C, Package Quantity=1, Power Dissipation=200mW, ComponentLink1Description=https://datasheet.ciiva.com/910/1n914bwt-910384.pdf, ComponentLink1URL=https://datasheet.ciiva.com/910/1n914bwt-910384.pdf, ComponentLink2Description=https://datasheet.ciiva.com/910/1n914bwt-910385.pdf, ComponentLink2URL=https://datasheet.ciiva.com/910/1n914bwt-910385.pdf, ComponentLink3Description=https://datasheet.ciiva.com/910/1n914bwt-910383.pdf, ComponentLink3URL=https://datasheet.ciiva.com/910/1n914bwt-910383.pdf, ComponentLink4Description=https://datasheet.ciiva.com/25953/1n4448wt-25953279.pdf, ComponentLink4URL=https://datasheet.ciiva.com/25953/1n4448wt-25953279.pdf, Contact Plating=Tin,Matte, Element Configuration=Single, Lead Free="Lead Free", Manufacturer Part Number=1N914BWT, Max Reverse Voltage (DC)=75V, Mount="Surface Mount", Number of Pins=2, Packaging="Tape and Reel", Peak Reverse Current=5uA, Pricing 1="1=0.17, 10=0.159, 100=0.0866, 500=0.0533, 1000=0.0364 (USD)", Radiation Hardening=No, REACH SVHC="No SVHC", Recovery Time=4ns, Reverse Recovery Time=4ns, Stock 1=39736, Supplier 1=Digi-Key, Weight=0.01g
P11 P15 P51 P52: "Header, 2-Pin", LatestRevisionDate=17-Jul-2002, LatestRevisionNote="Re-released for DXP Platform.", Publisher="Altium Limited"
P12: "Header, 4-Pin", LatestRevisionDate=17-Jul-2002, LatestRevisionNote="Re-released for DXP Platform.", Publisher="Altium Limited"
P13 P14: "Header, 3-Pin", LatestRevisionDate=17-Jul-2002, LatestRevisionNote="Re-released for DXP Platform.", Publisher="Altium Limited"
P16: "Header, 6-Pin", LatestRevisionDate=17-Jul-2002, LatestRevisionNote="Re-released for DXP Platform.", Publisher="Altium Limited"
P21: library part MHDR1X2, "Li-Poly Battery", LatestRevisionDate=17-Jul-2002, LatestRevisionNote="Re-released for DXP Platform.", Publisher="Altium Limited"
P22: library part CONN_MICRO_USB, "General  Micro USB", Manufacture P/N=10118194-0001LF
P41: library part PAD_SLIDER_3CH, "General Slider Touchpad"
P42 P43 P44: library part PAD_SINGLE, "General Single Touchpad"
Q31 Q51: library part DMG1012T-7, "MOSFET N-CH 20V 630MA SOT-523", Case/Package=SOT-523, Continuous Drain Current (ID)=630mA, Drain to Source Breakdown Voltage=20V, Drain to Source Resistance=300mR, Gate to Source Voltage (Vgs)=6V, Input Capacitance=60.67pF, Manufacturer=Diodes, Max Operating Temperature=150°C, Max Power Dissipation=280mW, Min Operating Temperature=-55°C, On-State Resistance=400MR, Package Quantity=3000, Threshold Voltage=1V, ComponentLink1Description=https://datasheet.ciiva.com/934/ds31783-934512.pdf, ComponentLink1URL=https://datasheet.ciiva.com/934/ds31783-934512.pdf, ComponentLink2Description=https://datasheet.ciiva.com/4442/ds31783-44973-4442944.pdf, ComponentLink2URL=https://datasheet.ciiva.com/4442/ds31783-44973-4442944.pdf, ComponentLink3Description=https://datasheet.ciiva.com/11174/ds31783-11174965.pdf, ComponentLink3URL=https://datasheet.ciiva.com/11174/ds31783-11174965.pdf, ComponentLink4Description=https://datasheet.ciiva.com/17324/ds31783-17324010.pdf, ComponentLink4URL=https://datasheet.ciiva.com/17324/ds31783-17324010.pdf, ComponentLink5Description=https://datasheet.ciiva.com/6383/ds31783-6383803.pdf, ComponentLink5URL=https://datasheet.ciiva.com/6383/ds31783-6383803.pdf, ComponentLink6Description=https://datasheet.ciiva.com/934/ds31783-934511.pdf, ComponentLink6URL=https://datasheet.ciiva.com/934/ds31783-934511.pdf, Contact Plating=Tin,Matte, Drain to Source Voltage (Vdss)=20V, Element Configuration=Single, Fall Time=12.3ns, FET Type="1 N-Channel", Height=0.8mm, Lead Free="Lead Free", Length=1.7mm, Manufacturer Part Number=DMG1012T-7, Mount="Surface Mount", Number of Channels=1, Number of Elements=1, Number of Pins=3, Packaging="Tape and Reel", Power Dissipation=280mW, Pricing 1="1=0.36, 10=0.326, 100=0.1824, 500=0.0977, 1000=0.0665 (USD)", Radiation Hardening=No, Rds On Max=400mR, REACH SVHC="No SVHC", Rise Time=7.4ns, Stock 1=0, Supplier 1=Digi-Key, Turn-Off Delay Time=26.7ns, Turn-On Delay Time=5.1ns, Weight=7.1E-05oz, Width=0.85mm
R11 R12 R13 R14 R15 R16 R17 R18 R19 R21 R22 R23 R24 R25 R26 R29 R31 R34 R35 R36 R37 R38 R39 R41 R42 R43 R45 R46 R47 R48 R49 R50 R51 R110 R210 R211 R212 R213 R214 R215 R310 R311: library part Res1, "Resistor", LatestRevisionDate=17-Jul-2002, LatestRevisionNote="Re-released for DXP Platform.", PackageDescription="Axial Device, Thru-Hole; 2 Leads; 0.3 in Pin Spacing", PackageReference=AXIAL-0.3, Published=8-Jun-2000, Publisher="Altium Limited"
RT21: "Thermistor", Code_IPC=RESC2012, LatestRevisionDate=29-May-2009, LatestRevisionNote="IPC-7351 Footprint Added.", PackageDescription="Chip Resistor 0805 Case Size", PackageReference=6-0805, PackageVersion=Mar-2003, Published=24-Mar-1999, Publisher="Altium Limited"
SW11 SW12: library part SW_TACT, "General Tactile Switch"
TP11 TP13 TP14 TP21 TP22 TP31 TP32 TP35 TP37: library part TP_A, "Test Point dot type"
U3: "Optical Sensor Ambient 565nm Current 6-SMD, No Lead"
U11: library part STM32L452CX, "ARM® Cortex®-M4 STM32L4 Microcontroller IC 32-Bit 80MHz 512KB (512K x 8) FLASH 48-UFQFPN (7x7)"
U21: "Battery Charger Li-Ion 200mA with LDO 100mA 12-Pin DFN EP T/R"
U22: "IC REG LDO 3V 0.2A SOT323-5", Case/Package=SOT-323-5, Dropout Voltage=300mV, Manufacturer=STMicroelectronics, Max Input Voltage=5.5V, Max Operating Temperature=125°C, Max Output Current=200mA, Min Input Voltage=1.9V, Min Operating Temperature=-40°C, Operating Supply Current=50uA, Output Voltage=3V, Package Quantity=1, Quiescent Current=60uA, Tolerance=2%, Accuracy=2%, ComponentLink1Description=https://datasheet.ciiva.com/6591/dm00070790-6591173.pdf, ComponentLink1URL=https://datasheet.ciiva.com/6591/dm00070790-6591173.pdf, ComponentLink2Description=https://datasheet.ciiva.com/6591/dm00070790-6591175.pdf, ComponentLink2URL=https://datasheet.ciiva.com/6591/dm00070790-6591175.pdf, ComponentLink3Description=https://datasheet.ciiva.com/6591/dm00070790-6591177.pdf, ComponentLink3URL=https://datasheet.ciiva.com/6591/dm00070790-6591177.pdf, ComponentLink4Description=https://datasheet.ciiva.com/8228/dm00070790-8228636.pdf, ComponentLink4URL=https://datasheet.ciiva.com/8228/dm00070790-8228636.pdf, ComponentLink5Description=https://datasheet.ciiva.com/41439/001184872-da-01-en-ic-reg-ldo-3v-0-ldk120c30r-sot-323-5-stm-41439977.pdf, ComponentLink5URL=https://datasheet.ciiva.com/41439/001184872-da-01-en-ic-reg-ldo-3v-0-ldk120c30r-sot-323-5-stm-41439977.pdf, Lead Free="Lead Free", Manufacturer Part Number=LDK120C30R, Mount="Surface Mount", Number of Outputs=1, Number of Pins=5, Number of Regulators=1, Output Current=200mA, Packaging="Tape and Reel", Polarity=Positive
U31: "Integrated Analog Front End (AFE) for Heart-Rate Monitors and Low-Cost Pulse Oximeters"
U32: "Accelerometer, Magnetometer, Temperature, 3 Axis Sensor I²C, SPI Output"
U41: library part AZOTEQ_IQS263, "3 Channel Capacitive Touch Sensor. Capacitive Touch Buttons, Slider, Wheel 10-DFN (3x3)"
Y1: library part XTAL, "Crystal Oscillator", LatestRevisionDate=17-Jul-2002, LatestRevisionNote="Re-released for DXP Platform.", PackageDescription="Crystal, Thru-Hole; 2 Leads; Body 3.1 x 8.2 mm (Dia.xH)", PackageReference=R38, Published=8-Jun-2000, Publisher="Altium Limited"

## Via types
v1: diameter 17.72, hole 11.81, Top Layer to Bottom Layer, 122 vias
v2: diameter 196.85, hole 122.05, Top Layer to Bottom Layer, 4 vias
v3: diameter 19.68, hole 13.78, Top Layer to Bottom Layer, 2 vias

## Nets (pads, with @x,y where several pads share a name; then routed paths per layer and width w, separated by ;. In a path a pad name is that pad's centre, name@x,y a point inside that pad or via, vN(x,y) a via of type N, cw(c..) or ccw(c..) an arc to the next point about the centre after c; other vN are vias at no path point)
3V3: C23.2 R23.1 R24.1 R29.1 R211.1 R212.1 R213.1 R214.1 R215.1 U21.3 | length 970.1
  Top Layer w7: C23.2@-2365.35,-399.06 -2361.5,-395.2 U21.3@-2285.08,-395.2 ; R213.1@-2237.32,-659.06 R213.1@-2237.01,-659.37 ; -2237.32,-624.06 R24.1@-2237.32,-569.06 R23.1@-2237.32,-514.06
  Top Layer w15: R212.1@-2477.01,-659.37 -2477.01,-624.06 ; R29.1@-2477.01,-398.74 -2477.01,-440.31 ; R214.1@-2417.01,-659.37 -2417.01,-624.06 ; C23.2@-2365.35,-399.06 -2365.35,-412.4 -2393.27,-440.31 -2477.01,-440.31 ; R215.1@-2357.01,-659.37 -2357.01,-624.06 ; R211.1@-2297.01,-659.37 -2297.01,-624.06 ; R213.1@-2237.32,-659.06 -2237.32,-624.06 -2297.01,-624.06 ; -2477.01,-624.06 -2477.01,-440.31 ; -2477.01,-624.06 -2417.01,-624.06 ; -2417.01,-624.06 -2357.01,-624.06 ; -2357.01,-624.06 -2297.01,-624.06
5V: C21.2 P22.1 R210.1 U21.1 | length 441.4
  Top Layer w10: R210.1@-2507.32,-144.06 -2507.32,-188.74 -2463.19,-232.87 -2318.19,-232.87 ; P22.1@-2318.19,-185.35 -2318.19,-232.87 ; U21.1@-2285.08,-359.76 -2283.66,-358.35 -2283.66,-267.4 -2318.19,-232.87
ADC1_IN7: R12.2 U11.12 | length 139.2
  Top Layer w10: v1(-2457.01,-1449.06) -2437.01,-1429.06 -2437.01,-1394.13 U11.12@-2438.82,-1392.32
  Bottom Layer w10: v1(-2457.01,-1449.06) -2436.69,-1428.74 R12.2@-2436.69,-1384.06
AFE_IN_N: D31.1 D37.3 TP31.1 U31.1 | length 1535.3
  Top Layer w7: TP31.1@-3687.01,-1314.06 -3687.01,-1327.99 v1(-3640,-1375) ; D31.1@-3492.01,-2334.13 v1(-3492.01,-2274.06) ; v1(-3467.64,-1378.43) D37.3@-3467.64,-1339.06 -3412.01,-1394.68 -3412.01,-1469.06 -3395.59,-1485.47 U31.1@-3369.13,-1485.47
  Bottom Layer w7: v1(-3640,-1375) -3625,-1390 -3479.21,-1390 v1(-3467.64,-1378.43) -3410.01,-1436.06 -3410.01,-2199.05 -3432.96,-2222 -3460,-2222 -3492.01,-2254.01 v1(-3492.01,-2274.06)
AFE_IN_P: D31.2 D36.3 TP32.1 U31.2 | length 1374.9
  Top Layer w7: TP32.1@-3680.91,-1476.93 -3680.91,-1455.91 v1(-3640,-1415) ; v1(-3492.01,-2154.06) D31.2@-3492.01,-2093.98 ; v1(-3467.01,-1414.06) D36.3@-3467.01,-1449.06 -3439.01,-1477.06 -3439.01,-1480.24 -3431.1,-1488.15 -3414.09,-1505.16 U31.2@-3369.13,-1505.16
  Bottom Layer w7: v1(-3640,-1415) -3630,-1405 -3476.06,-1405 v1(-3467.01,-1414.06) -3427.01,-1454.06 -3427.01,-2192.01 -3440,-2205 -3460,-2205 -3492.01,-2172.99 v1(-3492.01,-2154.06)
AFE_PDN: R38.1 U11.18 U31.20 | length 1208.1
  Top Layer w7: U31.20@-3163.43,-1691.18 -3163.43,-1712.64 -3151.69,-1724.37 R38.1@-3082.01,-1724.37 -2701.69,-1724.37 -2662.01,-1764.06 -2362.01,-1764.06 -2311.85,-1713.9 U11.18@-2311.85,-1420.87
AFE_RST: R36.1 U11.2 U31.29 | length 868.5
  Top Layer w7: U31.29@-3134.88,-1505.16 -3072.8,-1505.16 R36.1@-3056.69,-1489.06 -3056.69,-1483.74 -3002.01,-1429.06 -2842.01,-1429.06 -2707.01,-1294.06 -2707.01,-1224.06 -2678.43,-1195.47 U11.2@-2438.82,-1195.47
AFE_TX_N: D32.2 D33.1 D35.3 U31.14 | length 1036.2
  Top Layer w7: D32.2@-3667.01,-2158.94 -3633.98,-2158.94 -3587.36,-2205.56 -3396.65,-2205.56 -3350.04,-2158.94 D33.1@-3317.01,-2158.94 -3270.39,-2205.56 -3252.01,-2205.56 -3237.02,-2190.57 -3237.02,-2162.02 -3269.01,-2130.03 -3269.01,-1883.35 -3297.01,-1855.35 D35.3@-3297.01,-1839.06 -3267.69,-1809.74 -3267.69,-1768.37 -3281.54,-1754.53 U31.14@-3281.54,-1691.18
AFE_TX_P: D32.1 D33.2 D34.3 U31.15 | length 1064.4
  Top Layer w7: D32.1@-3667.01,-2269.17 -3633.98,-2269.17 -3587.36,-2222.56 -3396.65,-2222.56 -3350.04,-2269.17 D33.2@-3317.01,-2269.17 -3270.39,-2222.56 -3244.97,-2222.56 -3220.02,-2197.61 -3220.02,-2154.98 -3252.01,-2122.99 -3252.01,-1885.98 -3221.38,-1855.35 D34.3@-3221.38,-1839.06 -3250.69,-1809.74 -3250.69,-1761.33 -3261.85,-1750.17 U31.15@-3261.85,-1691.18
APDS_LED: R310.1 R311.1 U11.19 | length 1446
  Top Layer w7: R311.1@-2947.01,-2329.06 -2892.32,-2329.06 R310.1@-2892.01,-2328.74 -2816.69,-2328.74 -2727.01,-2239.06 -2727.01,-1879.06 -2667.01,-1819.06 -2342.01,-1819.06 -2292.17,-1769.21 U11.19@-2292.17,-1420.87
APDS_SUP: C313.2 R39.2 R214.2 U3.1 | length 1904.2
  Top Layer w7: C313.2@-3112.01,-2287.4 -3110.04,-2285.43 U3.1@-3062.6,-2285.43 -3062.6,-2094.33 R39.2@-3062.32,-2094.06
  Top Layer w10: R39.2@-3062.32,-2094.06 v1@-3062.32,-2054.06 ; v1(-2417.01,-749.06) R214.2@-2417.01,-698.74
  Signal Layer 1 w10: v1(-3062.01,-2054.06) -3062.01,-1894.06 -2827.01,-1659.06 -2827.01,-1219.06 -2417.01,-809.06 v1(-2417.01,-749.06)
BOOT: P16.4 R16.1 U11.44 | length 2479.4
  Top Layer w7: U11.44@-2331.54,-1147.24 -2331.54,-1098.58 -2267.01,-1034.06 -2237.01,-1034.06 -2227.01,-1024.06 R16.1@-2227.01,-1003.74 -2206.69,-1003.74 -2182.01,-979.06 -495,-979.06 -370,-854.06 -370,-684.06 -295,-609.06 P16.4@-215,-609.06
CH1: R43.2 R45.1 R48.1 | length 1665.3
  Top Layer w7: R43.2@-2047.95,-1889.37 -2047.95,-1928.11 -2042.01,-1934.06 -1777.01,-1934.06 ; R45.1@-1756.58,-1994.37 -1756.58,-1954.49 -1777.01,-1934.06 ; v1(-1322.01,-1974.06) -1362.01,-1934.06 -1777.01,-1934.06 ; v1(-1152.01,-1974.06) -872.01,-1974.06 -817.01,-2029.06 R48.1@-532.01,-2029.06
  Bottom Layer w7: v1(-1322.01,-1974.06) v1(-1152.01,-1974.06)
CH2: R42.2 R46.1 R49.1 | length 1531.8
  Top Layer w7: R46.1@-2301.58,-1999.37 v1(-2077.32,-1999.37) ; R42.2@-1987.95,-1889.37 -1983.27,-1894.06 v1(-1952.01,-1894.06) -1327.01,-1894.06 -1190.91,-2030.16 R49.1@-928.19,-2030.16
  Bottom Layer w7: v1(-2077.32,-1999.37) -2022.32,-1999.37 -1952.01,-1929.06 v1(-1952.01,-1894.06)
CH3: R41.2 R47.1 R50.1 | length 917.1
  Top Layer w7: R41.2@-2107.95,-1889.37 -2107.95,-1943.11 -2087.01,-1964.06 -2017.01,-1964.06 ; R47.1@-2016.58,-1994.37 -2016.58,-1964.49 -2017.01,-1964.06 ; v1(-1817.01,-1964.06) -2017.01,-1964.06 ; v1@-1697.01,-1959.06 v1(-1692.01,-1964.06) -1625.91,-2030.16 R50.1@-1318.19,-2030.16
  Bottom Layer w7: v1(-1817.01,-1964.06) v1(-1692.01,-1964.06)
COMP1_INP: P15.1 P15.2 R15.1 U11.20 | length 955.1
  Top Layer w7: U11.20@-2272.48,-1420.87 -2272.48,-1448.58 -2267.01,-1454.06 v1(-2267.01,-1474.06)
  Signal Layer 1 w7: v1(-2267.01,-1474.06) -2122.01,-1474.06 -2092.01,-1444.06 -2092.01,-1304.06 -2017.01,-1229.06 -1982.01,-1229.06 -1952.01,-1259.06 -1952.01,-1439.06 -1912.01,-1479.06 P15.2@-1912.01,-1484.06 P15.1@-1812.01,-1484.06
  Bottom Layer w7: R15.1@-2306.85,-1488.58 R15.1@-2307.32,-1489.06 -2282.01,-1489.06 v1(-2267.01,-1474.06)
CS_AFE: U11.3 U31.27 | length 902
  Top Layer w7: U31.27@-3134.88,-1544.53 -2992.48,-1544.53 v1(-2992.01,-1544.06) ; v1(-2942.01,-1459.06) -2837.01,-1459.06 -2687.01,-1309.06 -2687.01,-1234.06 -2667.01,-1214.06 -2612.01,-1214.06 -2607.01,-1209.06 -2587.01,-1209.06 -2580.91,-1215.16 U11.3@-2438.82,-1215.16
  Bottom Layer w7: v1(-2992.01,-1544.06) -2942.01,-1494.06 v1(-2942.01,-1459.06)
CS_MAG: U11.26 U32.3 | length 391.3
  Top Layer w7: U11.26@-2165.2,-1372.64 -1920.59,-1372.64 -1841.85,-1293.9 U32.3@-1841.85,-1258.58
CS_XL: U11.27 U32.2 | length 357.4
  Top Layer w7: U11.27@-2165.2,-1352.95 -1930.91,-1352.95 -1861.54,-1283.58 U32.2@-1861.54,-1258.58